# Altium PCB Pollux III.PcbDoc (part 2 of 3)
Units mm, origin at the board's own origin, x right, y up, seen from the top; angles counter-clockwise.
Board outline 123 x 84.5 mm, 4 copper layers (Top Layer, Ground Layer, Source Layer, Bottom Layer), stack 0.742 mm thick; 118 components, 107 nets, 741 pads, 375 vias.
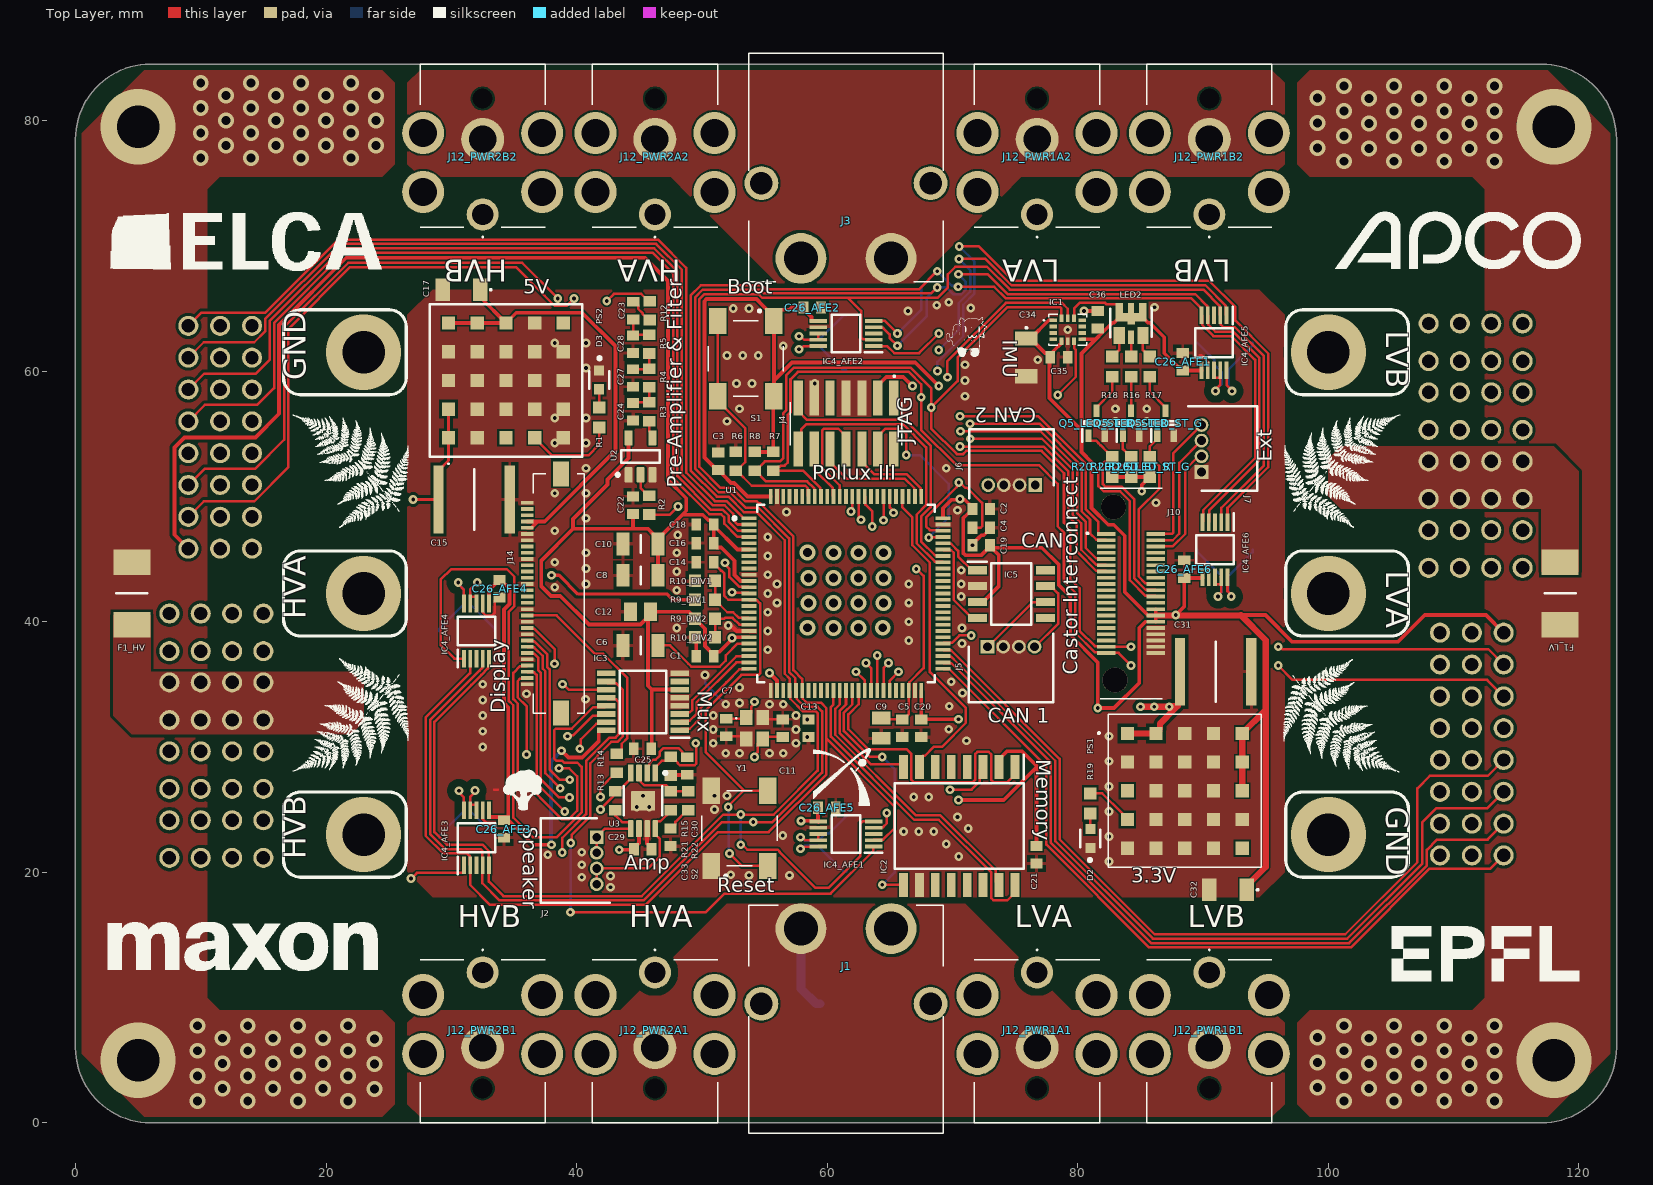
[diagram p0: Top Layer view]

## Part data (continued)
U3: library part CMP-0991-00073-2, "1.25-W Mono, Fully Differential, Class-AB Audio Amplifier with 1.8 V Compatible Shutdown Voltage, -40 to 85 degC, 8-pin SOP (DGN8), Green (RoHS & no Sb/Br)", Manufacturer="Texas Instruments", Output Power(W)=1.25, Supply Max(Max)(Volt)=5.5, Supply Min(Min)(Volt)=2.5, Code_JEDEC=MO-187, ComponentLink1Description="Manufacturer URL", ComponentLink1URL=http://www.ti.com/, ComponentLink2Description=Datasheet, ComponentLink2URL=http://www.ti.com/general/docs/lit/getliterature.tsp?genericPartNumber=TPA6205A1&fileType=pdf, ComponentLink3Description="Package Specification", ComponentLink3URL=http://www.ti.com/litv/pdf/mpds046e, DatasheetVersion=SLOS490B, Eco-Plan="Green (RoHS & no Sb/Br)", Mounting Technology="Surface Mount", PackageDescription="8-Pin Plastic Small Outline, Body 3 x 3 mm, Pitch 0.65 mm", PackageReference=DGN0008D, PackageVersion="4073271/F, 05/2011", PartNumber=TPA6205A1DGN, PSRR(dB)=-90, Speaker Amp Type=Class-AB, Speaker Channels=Mono, SubFamily="Dynamic Speaker"
Y1: library part NX2520SA-25.000M-STD-CSW-5, "Crystal or Oscillator", Manufacturer_Name=NDK, Mouser Part Number=344-NX2520SA25MSTSW5, Supplier Part Number 1=344-NX3225SA30MSTSR3, Datasheet Link=https://kr.mouser.com/datasheet/2/905/ndk_08142018_NX2520SA-19.200000MHZ-NBG1-1389014.pdf, Height=0.55mm, Manufacturer_Part_Number=NX2520SA-25.000M-STD-CSW-5, Mouser Price/Stock=https://www.mouser.co.uk/ProductDetail/NDK/NX2520SA-25000M-STD-CSW-5?qs=w%2Fv1CP2dgqoYJPVY2dD4UA%3D%3D, Supplier 1=Mouser

## Via types
v1: diameter 0.7, hole 0.3, Top Layer to Bottom Layer, 237 vias
v2: diameter 1.27, hole 0.711, Top Layer to Bottom Layer, 128 vias
v3: diameter 6, hole 3.4, Top Layer to Bottom Layer, 10 vias

## Nets (pads, with @x,y where several pads share a name; then routed paths per layer and width w, separated by ;. In a path a pad name is that pad's centre, name@x,y a point inside that pad or via, vN(x,y) a via of type N, cw(c..) or ccw(c..) an arc to the next point about the centre after c; other vN are vias at no path point)
3V3: C1.1 C2.1 C3.1 C8.2 C10.2 C12.1 C13.1 C16.1 C18.1 C19.1 C20.1 C21.1 C22.1 C25.1 C26_AFE1.2 C26_AFE2.2 C26_AFE3.2 C26_AFE4.2 C26_AFE5.2 C26_AFE6.2 C29.1 C32.1 C34.1 C35.1 C36.1 IC1.1 IC1.5 IC1.8 IC1.12 IC2.2 IC3.6 IC3.16 IC4_AFE1.6 IC4_AFE2.6 IC4_AFE3.6 IC4_AFE4.6 IC4_AFE5.6 IC4_AFE6.6 IC5.3 J4.3 J10.26 J10.28 J10.30 J13_HV.S17 J13_LV.S17 LED2.1 LED2.2 LED2.3 LED2.7 LED2.8 PS1.A5 PS1.B5 PS1.C5 R7.1 R8.1 R9_DIV2.1 R20_LED_ST_B.1 R20_LED_ST_G.1 R20_LED_ST_R.1 S1.1 S1.2 U1.6 U1.11 U1.20 U1.27 U1.50 U1.75 U1.100 U2.5 U3.6 | length 568.9
  Top Layer w0.2: IC1.12@79.7,64.2 79.7,65 80.15,65.45 82.184,65.45 82.309,65.325 83.1,65.325 83.3,65.125 LED2.3@83.3,65.025
  Top Layer w0.3: J13_HV.S17@9.01,45.83 7.908,46.932 7.908,53.907 8.701,54.7 14.359,54.7 16.25,56.591 16.25,63.684 21.616,69.05 45.45,69.05 47.3,67.2 47.3,51.304 48.75,49.854 48.75,48.85 48.44,48.54 ; IC4_AFE3.6@33,24.95 33,24.4 34.33,24.4 C26_AFE3.2@34.54,24.19 ; IC4_AFE4.6@33,41.45 33,42.502 33.51,43.012 33.51,43.085 33.75,43.325 C26_AFE4.2@33.85,43.325 33.95,43.325 34.64,42.635 34.64,41.411 34.2,40.971 34.2,33.5 34.54,33.16 C26_AFE3.2@34.54,24.19 ; v1(38,22.2) 36.53,22.2 C26_AFE3.2@34.54,24.19 ; v1(38.8,29.7) 39.35,29.15 40.45,29.15 41.774,30.474 41.774,31.25 41.849,31.325 IC3.16@42.362,31.325 ; v1(43.4,21.8) 44.551,21.8 C29.1@44.575,21.824 44.575,21.924 44.975,22.324 U3.6@44.975,23.475 ; U2.5@44.15,54.675 44.15,53.046 42.462,51.358 42.462,50.937 39.71,48.185 39.71,47.41 ; C22.1@44.5,48.6 44.5,47.41 ; C25.1@45.996,30.21 45.996,34.575 ; C8.2@46.5,43.7 C10.2@46.5,46.2 C10.2@46.5,46.6 ; IC3.6@48.238,34.575 45.996,34.575 ; C1.1@50.95,37.25 C1.1@50.95,37.35 ; v1@52.223,38.424 51.389,37.59 51.19,37.59 C1.1@50.95,37.35 ; v1(52.4,38.7) 52.45,38.75 U1.20@53.75,38.75 ; U1.11@53.75,43.25 53.076,43.25 52.6,43.726 52.6,44.859 51.549,45.91 51.19,45.91 50.95,46.15 C16.1@50.95,46.25 C18.1@50.95,47.65 ; U1.6@53.75,45.75 52.85,45.75 C18.1@50.95,47.65 ; R8.1@54.2,53.55 R7.1@55.7,53.55 55.7,57.95 S1.2@55.75,58 55.75,59.24 ; v1(55.4,35.9) 56,35.3 U1.27@56,34.5 ; U1.100@55.5,50 53.646,50 52.571,51.075 52.325,51.075 51.64,51.76 51.64,51.86 51.4,52.1 C3.1@51.3,52.1 51.2,52.1 50.2,53.1 50.2,65.574 50.376,65.75 54.35,65.75 54.775,65.325 S1.1@55.75,64.35 ; v1(57.9,24.1) 59.2,24.1 IC4_AFE1.6@59.3,24 ; C26_AFE5.2@59.275,25.15 59.275,24.05 IC4_AFE1.6@59.3,24.05 ; IC4_AFE2.6@59.3,64 58.75,64 58.75,64.325 58.1,64.975 C26_AFE2.2@58.1,65.075 57.168,65.075 56.992,64.9 56.3,64.9 S1.1@55.75,64.35 ; J4.3@64.04,57.835 64.04,58.86 64.71,59.53 66.07,59.53 v1(66.8,58.8) ; U1.50@67.5,34.5 C20.1@67.5,32.2 67.503,32.203 70.467,32.203 v1(70.47,32.205) ; v1(68.9,58.8) 67.02,60.68 57.19,60.68 55.75,59.24 ; U1.75@69.25,48.25 69.25,49.05 69.923,49.723 70.523,49.723 v1(70.6,49.8) 70.677,49.723 70.977,49.723 71.6,49.1 C2.1@71.6,49 71.6,48.9 71.36,48.66 71.26,48.66 70.85,48.25 70.85,46.868 70.85,45.486 71.026,45.31 72.31,45.31 73,46 C19.1@73.1,45.9 ; v1(70.47,25.77) 74.087,25.77 76.7,28.383 ; IC5.3@71.988,41.565 72.425,41.565 73.7,42.84 73.7,45.3 C19.1@73.1,45.9 ; IC2.2@73.71,28.4 73.71,29.012 74.36,29.662 75.538,29.662 76.7,28.5 76.7,28.383 ; C34.1@75.9,62.6 C34.1@76.225,62.6 ; C21.1@76.7,22.1 76.7,28.383 ; IC1.1@78.05,64.05 77.675,64.05 C34.1@76.225,62.6 ; IC1.5@78.7,62.4 78.7,62.25 78.04,61.59 78.04,61.34 C35.1@77.8,61.1 ; IC1.8@80.35,62.55 81.45,62.55 ; R20_LED_ST_B.1@82.75,51.55 R20_LED_ST_R.1@84.25,51.55 R20_LED_ST_G.1@85.725,51.55 ; v1(85.1,50.4) 85.1,50.9 85.4,51.2 85.4,51.225 R20_LED_ST_G.1@85.725,51.55 ; 85.401,40 84.9,39.499 84.9,35.1 82.9,33.1 v1(81.6,33.1) 81.6,36.752 79.4,38.952 79.4,42 78.475,42.925 78.475,44.554 77.129,45.9 C19.1@73.1,45.9 ; R20_LED_ST_G.1@85.75,51.55 R20_LED_ST_G.1@85.725,51.55 ; J10.30@86.225,40 J10.28@86.225,40.5 ; J10.26@86.225,41 J10.28@86.225,40.5 ; v1(87.825,40.525) 88.502,41.202 C26_AFE6.2@88.502,43.494 89.95,43.494 IC4_AFE6.6@89.95,43.55 ; IC4_AFE5.6@89.875,60.05 C26_AFE1.2@88.375,60.05 88.275,60.05 86.905,61.42 86.905,62.696 85.738,63.862 85.613,63.862 85.175,64.3 LED2.8@84.25,64.3 83.325,64.3 82.887,63.862 82.762,63.862 82,63.1 81.45,62.55 ; 93.001,40.525 94.975,40.525 97.1,38.4 105.564,38.4 107.689,40.525 112.585,40.525 J13_LV.S17@113.99,39.12 ; 39.71,47.41 37.185,44.885 37.185,42.815 37.947,42.053 38.697,42.053 40.985,39.765 45.09,39.765 C12.1@45.69,40.365 ; 39.71,47.41 44.5,47.41 ; 44.5,47.41 45.69,47.41 46.14,46.96 C10.2@46.5,46.6 ; C12.1@45.69,40.365 45.69,34.881 45.996,34.575 ; C12.1@45.69,40.365 45.69,40.59 C12.1@45.9,40.8 48.925,40.8 49.45,40.275 R9_DIV2.1@49.45,40.25 49.45,40.225 50.243,39.432 50.243,38.058 C1.1@50.95,37.35 ; C10.2@46.5,46.6 48.44,48.54 ; 48.44,48.54 50.064,48.54 50.514,48.09 50.71,48.09 50.95,47.85 C18.1@50.95,47.75 C18.1@50.95,47.65 ; 55.75,59.24 S1.1@55.75,64 S1.1@55.75,64.35 ; C34.1@76.225,62.6 77.385,61.44 77.56,61.44 77.8,61.2 C35.1@77.8,61.1 ; C35.1@77.8,61.1 77.75,61.05 77.75,57.831 80.3,55.281 ; 80.3,55.281 80.3,61.4 81.45,62.55 ; 80.3,55.281 80.3,53.531 81.1,52.731 81.1,49.073 82.439,47.735 82.864,47.735 83.75,46.849 83.75,42.375 85.625,40.5 J10.28@86.225,40.5
  Top Layer w0.5: J10.28@86.225,40.5 87.8,40.5 v1(87.825,40.525) 87.85,40.5 93.026,40.5 ; 93.001,40.525 93.026,40.5 ; PS1.C5@93.12,26.5 PS1.B5@93.12,28.79 PS1.A5@93.12,31.08 94.94,32.9 95,32.9 ; C32.1@93.5,18.6 93.5,18.925 95,20.425 95,32.9 ; 93.026,40.5 95,38.526 95,32.9
  Ground Layer w0.3: v1(38,22.2) 38.778,22.978 39.406,22.978 40.128,23.7 42.5,23.7 ; v1(43.4,21.8) 43.4,22.8 42.5,23.7 ; v1(52.4,38.7) 52.5,38.7 55.3,35.9 v1(55.4,35.9) 61,35.9 ; v1(58.4,32.2) 58.4,33.3 61,35.9 ; v1(68.9,58.8) v1(66.8,58.8) 66.8,57.5 68,56.3 68.8,56.3 69.55,57.05 71.25,57.05 72.2,56.1 72.2,51.7 70.677,50.177 70.677,49.877 v1(70.6,49.8) ; v1(81.6,33.1) 71.365,33.1 v1(70.47,32.205) ; v1(85.1,50.4) 85.1,43.25 v1(87.825,40.525) ; 42.5,23.7 48.793,23.7 49.143,23.35 55.436,23.35 55.66,23.574 57.295,23.574 57.821,24.1 v1(57.9,24.1) 64.456,24.1 64.481,24.075 68.775,24.075 v1(70.47,25.77) v1(70.47,32.205) ; 61,35.9 63.3,38.2 65.8,38.2 70.47,33.53 v1(70.47,32.205)
  Bottom Layer w0.3: v1(38,22.2) 37.95,22.25 37.95,28.85 v1(38.8,29.7)
+5: C17.1 J14.26 J14.27 PS2.A5 PS2.B5 PS2.C5 | length 37.7
  Top Layer w0.3: PS2.A5@29.777,63.83 PS2.B5@32.067,63.83 PS2.C5@34.357,63.83 ; C17.1@32.3,67.1 32.3,65.887 PS2.C5@34.357,63.83 ; J14.26@36.05,47.5 36.4,47.5 36.9,48 ; J14.27@36.05,48 36.9,48 ; PS2.C5@34.357,63.83 35.187,64.66 40.44,64.66 43.1,62 43.1,53.65 37.45,48 36.9,48
A1_C: J13_LV.S21 U1.54 | length 67.1
  Top Layer w0.2: U1.54@69.25,37.75 69.3,37.7 69.904,37.7 78.55,29.054 78.55,22.635 86.135,15.05 101.35,15.05 107.1,20.8 107.1,26.7 108.1,27.7 112.73,27.7 J13_LV.S21@113.99,28.96
A1_S: J13_LV.S23 U1.52 | length 62.4
  Top Layer w0.2: U1.52@69.25,36.75 69.3,36.7 69.904,36.7 77.85,28.754 77.85,22.345 85.845,14.35 101.655,14.35 107.858,20.552 107.858,21.776 108.682,22.6 112.71,22.6 J13_LV.S23@113.99,23.88
A2_C: J13_HV.S21 U1.4 | length 72.6
  Top Layer w0.2: J13_HV.S21@9.01,55.99 10.32,57.3 14.5,57.3 15.85,58.65 15.85,63.85 21.45,69.45 46.05,69.45 47.7,67.8 47.7,51.47 50.595,48.575 51.535,48.575 51.8,48.31 51.8,47.815 52.85,46.765 53.735,46.765 U1.4@53.75,46.75
A2_S: J13_HV.S23 U1.2 | length 68.2
  Top Layer w0.2: J13_HV.S23@9.01,61.07 10.24,62.3 14.268,62.3 15.142,63.174 15.142,64.148 21.145,70.15 46.34,70.15 48.4,68.09 48.4,51.76 50.885,49.275 51.825,49.275 52.5,48.6 52.5,48.105 52.85,47.755 53.745,47.755 U1.2@53.75,47.75
APD: J14.12 R14.1 | length 16.5
  Top Layer w0.2: J14.12@36.05,40.5 38.401,40.5 41.475,37.427 42.126,37.427 44.05,35.504 44.05,30.707 43.6,30.257 43.6,29.775 43.275,29.45 R14.1@43.2,29.45
APWM: J14.10 R2.1 | length 23.3
  Top Layer w0.2: J14.10@36.05,39.5 36.1,39.45 36.604,39.45 38.243,37.81 v1(38.243,36.643) ; R2.1@45.8,48.55 47.45,48.55 v1(48.1,49.2)
  Source Layer w0.2: v1(38.243,36.643) 38.243,37.943 48.1,47.8 v1(48.1,49.2)
B1_C: J13_LV.S22 U1.53 | length 64.6
  Top Layer w0.2: U1.53@69.25,37.25 69.3,37.2 69.9,37.2 69.95,37.15 69.954,37.15 70.1,37.004 70.1,37 78.2,28.9 78.2,22.49 85.99,14.7 101.51,14.7 107.5,20.69 107.5,24 108.6,25.1 112.67,25.1 J13_LV.S22@113.99,26.42
B1_S: J13_LV.S24 U1.51 | length 60.7
  Top Layer w0.2: U1.51@69.25,36.25 69.3,36.2 69.75,36.2 77.5,28.45 77.5,22.2 85.7,14 101.8,14 108.088,20.288 112.938,20.288 J13_LV.S24@113.99,21.34
B2_C: J13_HV.S22 U1.3 | length 70.4
  Top Layer w0.2: J13_HV.S22@9.01,58.53 10.28,59.8 14.4,59.8 15.5,60.9 15.5,64.01 21.29,69.8 46.195,69.8 48.05,67.945 48.05,51.615 50.74,48.925 51.68,48.925 52.15,48.455 52.15,47.96 52.85,47.26 53.74,47.26 U1.3@53.75,47.25
B2_S: J13_HV.S24 U1.1 | length 66.4
  Top Layer w0.2: J13_HV.S24@9.01,63.61 10.062,64.662 15.162,64.662 21,70.5 46.485,70.5 48.75,68.235 48.75,51.905 51.03,49.625 51.97,49.625 53.25,48.345 53.25,48.3 53.3,48.25 U1.1@53.75,48.25
BOOT: R6.2 S1.3 S1.4 U1.94 | length 20.1
  Top Layer w0.2: S1.3@51.25,64 S1.4@51.25,58 51.25,57.65 53.45,55.45 53.45,52.725 R6.2@52.775,52.05 ; R6.2@52.7,52.05 R6.2@52.775,52.05 ; U1.94@58.5,50 58.45,50.05 58.45,50.654 58.254,50.85 53.975,50.85 R6.2@52.775,52.05
BYPASS: C30.2 U3.2 | length 4.9
  Top Layer w0.2: U3.2@45.625,27.925 45.625,28.375 45.8,28.55 45.8,28.675 46.103,28.978 46.312,28.978 46.617,29.283 46.617,29.596 46.922,29.901 48.129,29.901 48.435,29.595 48.435,29.466 48.725,29.176 C30.2@48.825,29.176
CAN_RX: IC5.4 U1.70 | length 7.2
  Top Layer w0.2: U1.70@69.25,45.75 69.3,45.7 69.904,45.7 70.1,45.504 70.1,41.745 71.55,40.295 IC5.4@71.988,40.295
CAN_TX: IC5.1 U1.71 | length 3.9
  Top Layer w0.2: U1.71@69.25,46.25 69.3,46.2 69.904,46.2 70.45,45.654 70.45,45.205 71.55,44.105 IC5.1@71.988,44.105
CANH: IC5.7 J5.4 J6.4 | length 21
  Top Layer w0.2: J5.4@76.6,38 78.425,39.825 78.425,42.26 77.85,42.835 IC5.7@77.412,42.835
  Source Layer w0.2: J6.4@72.85,50.9 76.9,46.85 76.9,38.567 76.55,38.217 J5.4@76.55,38
CANL: IC5.6 J5.1 J6.1 | length 24.8
  Top Layer w0.2: J5.1@72.85,38 76.415,41.565 IC5.6@77.412,41.565
  Source Layer w0.2: J5.1@72.8,38 73.7,37.1 76.883,37.1 77.35,37.567 77.35,50.15 J6.1@76.6,50.9